# EAGLE board Slave_Micro_Circuit_Manual (EAGLE 9.3.0)
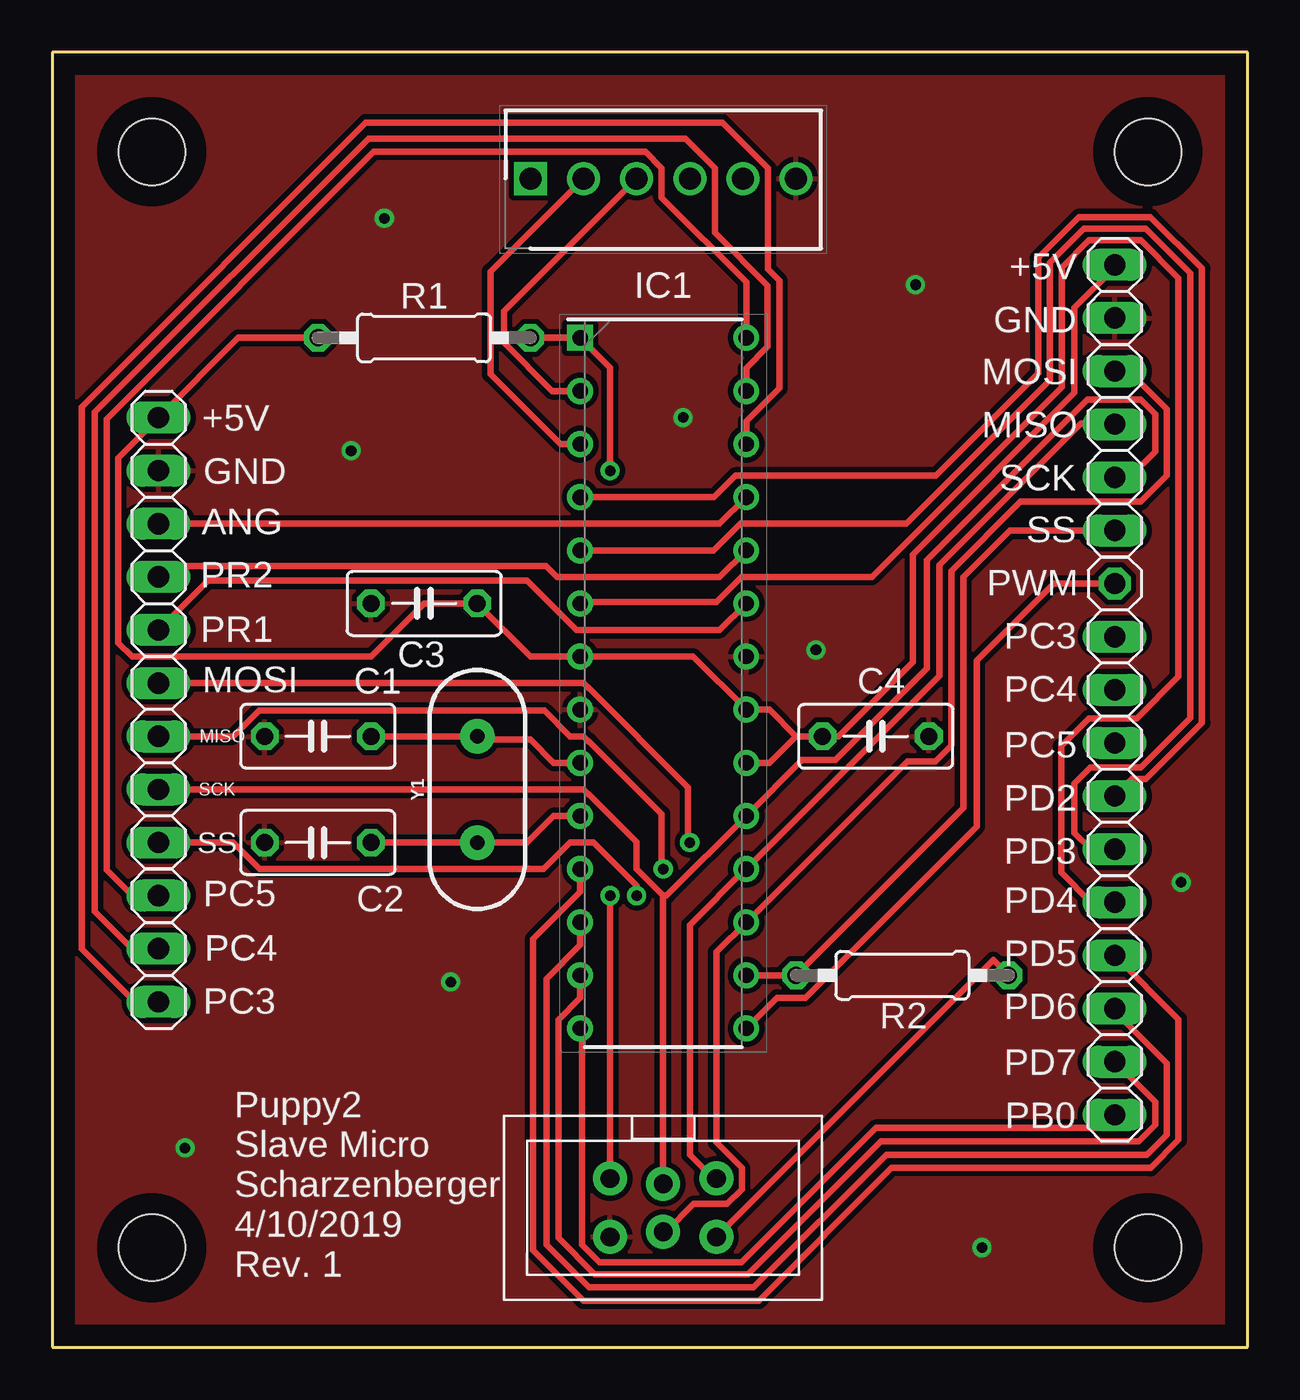
[diagram p0: board, top side]
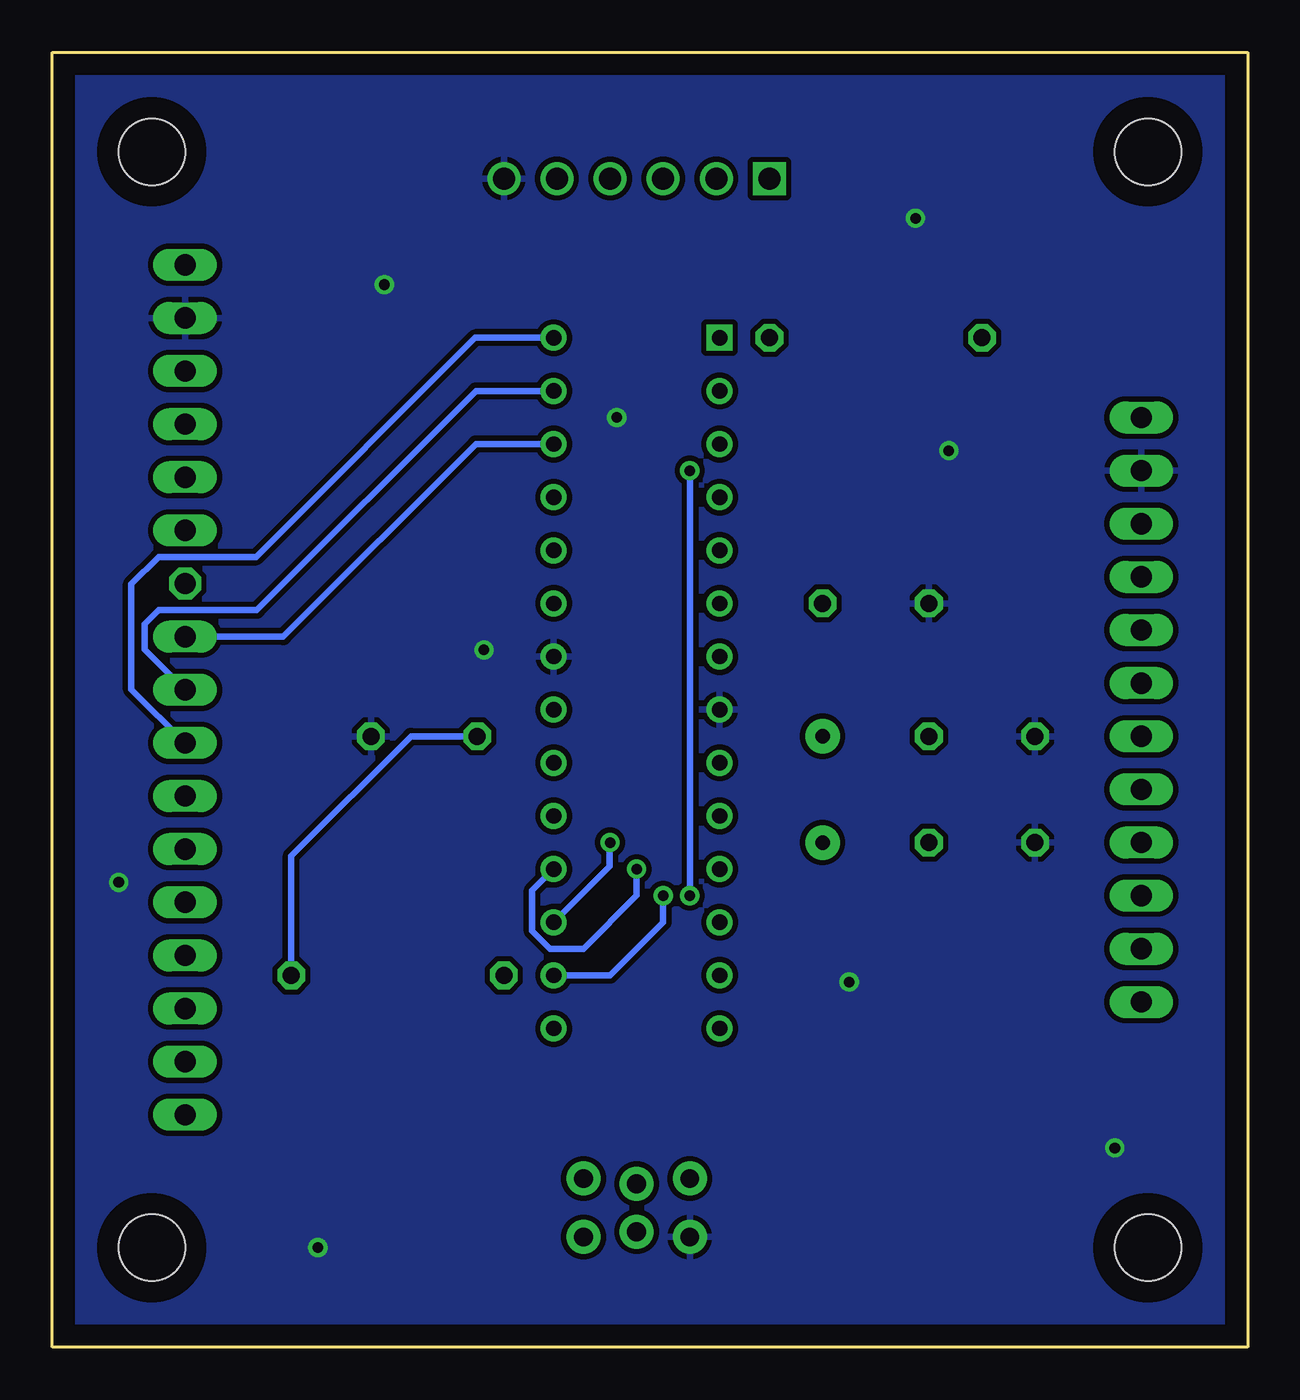
[diagram p1: board, bottom side, seen from below]

Size 57.15 x 61.91 mm. Coordinates in mm from the lower left corner, seen from the top.
Outline: 0,0 57.15,0 57.15,61.91 0,61.91 0,0
Copper layers (1*16): Top 0.035mm / dielectric 1.5mm / Bottom 0.035mm
Design rules "default": minimum track width 6mil, minimum drill 0.35mm, track to track 6mil, track to pad 6mil, pad to pad 6mil, via to via 6mil, smd to smd 6mil, copper to edge 40mil, drill to drill 6mil, minimum pad ring 10mil, minimum via ring 8mil, stop-mask expansion 4mil, vias tented up to drill 0mil, thermal gap 10mil
Net classes: 0 default: width 0.305 mm, drill 0.508 mm, clearance 0.254 mm
Holes 3.17 mm at 4.76,57.15 52.39,57.15 52.39,4.76 4.76,4.76

## Footprints (pad centres in the part's own frame; a part is rotated, then mirrored left to right if it is on the bottom)
C050-030X075 = drill 0.813 octagon: 1 -2.54,0; 2 2.54,0
DIP794W53P254L3467H457Q28N = drill 0.733 pad 1.133 square: 1 -3.969,16.51 | drill 0.733 pad 1.133: 2 -3.969,13.97; 3 -3.969,11.43; 4 -3.969,8.89; 5 -3.969,6.35; 6 -3.969,3.81; 7 -3.969,1.27; 8 -3.969,-1.27; 9 -3.969,-3.81; 10 -3.969,-6.35; 11 -3.969,-8.89; 12 -3.969,-11.43; 13 -3.969,-13.97; 14 -3.969,-16.51; 15 3.969,-16.51; 16 3.969,-13.97; 17 3.969,-11.43; 18 3.969,-8.89; 19 3.969,-6.35; 20 3.969,-3.81; 21 3.969,-1.27; 22 3.969,1.27; 23 3.969,3.81; 24 3.969,6.35; 25 3.969,8.89; 26 3.969,11.43; 27 3.969,13.97; 28 3.969,16.51
AVRISP-BOX = drill 0.9 pad 1.626: 1 -1.397,2.54; 2 1.397,2.54; 3 -1.143,0; 4 1.143,0; 5 -1.397,-2.54; 6 1.397,-2.54
SHDR6W87P0X254_1X6_1509X635X10 = drill 1.05 pad 1.575 square: 1 0,0 | drill 1.05 pad 1.575: 2 2.54,0; 3 5.08,0; 4 7.62,0; 5 10.16,0; 6 12.7,0
1X02 = drill 1.016 long: 1 -1.27,0; 2 1.27,0
1X04 = drill 1.016 long: 1 -3.81,0; 2 -1.27,0; 3 1.27,0; 4 3.81,0
1X10 = drill 1.016 long: 1 -11.43,0; 2 -8.89,0; 3 -6.35,0; 4 -3.81,0; 5 -1.27,0; 6 1.27,0; 7 3.81,0; 8 6.35,0; 9 8.89,0; 10 11.43,0
1X03 = drill 1.016 long: 1 -2.54,0; 2 0,0; 3 2.54,0
1X01 = drill 1.016 octagon: 1 0,0
0207/10 = drill 0.813 octagon: 1 -5.08,0; 2 5.08,0
HC49US = drill 0.7 pad 1.651: 1 -2.54,0; 2 2.54,0

## Placement (x,y rotation side)
C1  [C050-030X075]  12.7,29.21 180 top
C2  [C050-030X075]  12.7,24.13 180 top
C3  [C050-030X075]  17.78,35.56 180 top
C4  [C050-030X075]  39.37,29.21 0 top
IC1  ATMEGA88A-PU  [DIP794W53P254L3467H457Q28N]  29.21,31.75 0 top
ISP1  AVRISP-BOX  [AVRISP-BOX]  29.21,6.67 270 top
J1  22-23-2061  [SHDR6W87P0X254_1X6_1509X635X10]  22.86,55.88 0 top
JP1  [1X02]  5.08,43.18 90 top
JP2  [1X02]  50.8,50.48 90 top
JP3  [1X04]  5.08,27.94 270 top
JP4  [1X04]  50.8,42.86 270 top
JP5  [1X10]  50.8,22.54 270 top
JP6  [1X03]  5.08,36.83 90 top
JP7  [1X01]  50.8,36.51 0 top
JP8  [1X03]  5.08,19.05 90 top
R1  [0207/10]  17.78,48.26 0 top
R2  [0207/10]  40.64,17.78 180 top
Y1  16MHz  [HC49US]  20.32,26.67 90 top

## Library data of the parts
C1-C4 ISP1 = adafruit
IC1 = SamacSys_Parts; DESCRIPTION: ATMEGA88A-PU, 8 bit AVR Microcontroller 20MHz 512 B, 8 kB Flash, 1 kB RAM, I2C 28-Pin PDIP; HEIGHT: 4.572mm; MANUFACTURER_NAME: Microchip; MANUFACTURER_PART_NUMBER: ATMEGA88A-PU; MOUSER_PART_NUMBER: 556-ATMEGA88A-PU
J1 = SamacSys_Parts; DESCRIPTION: 2.54mm,header,KK,vert,Sn,frictn lock,6w Molex KK 254 Series, Series Number 6373, 2.54mm Pitch 6 Way 1 Row Straight PCB Header, Through Hole, Solder Termination; HEIGHT: 10.67mm; MANUFACTURER_NAME: Molex; MANUFACTURER_PART_NUMBER: 22-23-2061; MOUSER_PART_NUMBER: 538-22-23-2061
JP1-JP8 = pinhead
R1 R2 = rcl; SPICEPREFIX: R
Y1 = SparkFun-Clocks; PROD_ID: XTAL-08181; SF_ID: COM-00536

## Nets
+5V: C3.1 C4.1 IC1.7 IC1.20 IC1.21 ISP1.2 JP1.2 JP2.2 R1.1 R2.1
GND: C1.2 C2.2 C3.2 C4.2 IC1.8 IC1.22 ISP1.6 J1.6 JP1.1 JP2.1
MISO: IC1.18 ISP1.1 JP3.2 JP4.2
MOSI: IC1.17 ISP1.4 JP3.1 JP4.1
N$543: C2.1 IC1.10 Y1.1
N$546: C1.1 IC1.9 Y1.2
PB0: IC1.14 JP5.10
PC3: IC1.26 JP5.1 JP8.1
PC4: IC1.27 JP5.2 JP8.2
PC5: IC1.28 JP5.3 JP8.3
PD2: IC1.4 JP5.4
PD3: IC1.5 JP5.5
PD4: IC1.6 JP5.6
PD5: IC1.11 JP5.7
PD6: IC1.12 JP5.8
PD7: IC1.13 JP5.9
PRESSURE1: IC1.23 JP6.1
PRESSURE2: IC1.24 JP6.2
PWM: IC1.15 JP7.1
RESET: IC1.1 ISP1.5 R1.2
RX: IC1.2 J1.3
SCK: IC1.19 ISP1.3 JP3.3 JP4.3
SS: IC1.16 JP3.4 JP4.4 R2.2
THETA: IC1.25 JP6.3
TX: IC1.3 J1.2

## Tracks (layer width: path | path; a pad name or v marks a point on that pad's centre or on a via)
+5V
  Top 0.305: R1.1 8.89,48.26 JP1.2 3.15,42.52 3.15,33.68 3.81,33.02 15.24,33.02 17.78,35.56 C3.1 22.86,33.02 IC1.7 30.64,33.02 IC1.21 34.29,30.48 35.56,29.21 | R2.1 44.99,18.51 ISP1.2 | 35.56,29.21 C4.1 37.59,29.21 41.15,32.77 41.15,37.91 48.87,45.63 48.87,49.7 50.8,51.63 JP2.2 | 35.56,29.21 34.29,27.94 IC1.20
  Bottom 0.305: R2.1 45.72,23.5 40.01,29.21 C4.1
GND  (via drill 0.51)
  other vias: 6.35,9.53 19.05,17.46 14.29,42.86 15.88,53.98 41.27,50.8 36.51,33.34 53.98,22.23 44.45,4.76 30.16,44.45
  pour Top: -1.27,63.5 -1.27,-1.27 58.8,-1.27 58.8,63.5
  pour Bottom: -1.27,63.5 -1.27,-1.27 58.8,-1.27 58.8,63.5
MISO  (via drill 0.51)
  Top 0.305: ISP1.1 31.62,8.06 30.48,9.21 30.48,20.19 33.15,22.86 IC1.18 42.42,32.1 42.42,37.4 49.18,44.16 50.77,44.16 JP4.2 | JP3.2 8.65,29.21 9.88,30.44 23.53,30.44 24.76,29.21 25.4,29.21 25.64,28.97 25.67,28.97 29.13,25.5 29.13,22.94 v29.21,22.86
  Bottom 0.305: IC1.18 34.21,21.83 34.21,19.89 33.36,19.05 31.75,19.05 29.21,21.59 v29.21,22.86
MOSI  (via drill 0.51)
  Top 0.305: ISP1.4 29.34,5.52 30.66,6.84 32.26,6.84 32.97,7.56 32.97,8.57 31.75,9.79 31.75,18.89 IC1.17 40.88,28.02 42.23,28.02 42.98,28.77 42.98,37.1 46.3,40.42 52.05,40.42 53.29,41.67 53.29,44.85 51.47,46.67 JP4.1 | JP3.1 25.4,31.75 25.64,31.51 25.67,31.51 30.4,26.77 30.4,24.21 v30.48,24.13
  Bottom 0.305: IC1.17 30.5,23 30.5,24.11 v30.48,24.13
N$543
  Top 0.305: IC1.10 23.97,25.4 22.7,24.13 Y1.1 C2.1
N$546
  Top 0.305: IC1.9 23.97,27.94 22.86,29.05 20.48,29.05 Y1.2 C1.1
PB0
  Top 0.305: JP5.10 50.16,10.48 39.37,10.48 32.94,4.05 26.16,4.05 25.32,4.89 25.32,15.16 IC1.14
PC3
  Top 0.305: IC1.26 33.18,44.27 34.77,45.85 34.77,50.99 34.21,51.54 34.21,56.38 32.04,58.55 14.99,58.55 1.4,44.96 1.4,19.05 3.94,16.51 JP8.1
  Bottom 0.305: IC1.26 36.89,43.18 46.1,33.97 JP5.1
PC4
  Top 0.305: IC1.27 33.18,46.81 34.21,47.84 34.21,50.76 31.67,53.29 31.67,56.38 30.26,57.78 15.11,57.78 2.03,44.7 2.03,20.83 3.81,19.05 JP8.2
  Bottom 0.305: JP5.2 52.73,33.36 52.73,34.58 52.07,35.24 47.37,35.24 36.89,45.72 IC1.27
PC5
  Top 0.305: IC1.28 33.18,50.93 29.13,54.97 29.13,56.38 28.36,57.15 15.37,57.15 2.59,44.38 2.59,22.81 3.81,21.59 JP8.3
  Bottom 0.305: JP5.3 53.37,31.46 53.37,36.49 52.07,37.78 47.4,37.78 36.92,48.26 IC1.28
PD2
  Top 0.305: JP5.4 51.61,27.16 52.28,27.16 54.97,29.85 54.97,51.58 52.51,54.04 49.09,54.04 47.14,52.09 47.14,46.57 42.24,41.67 32.65,41.67 31.63,40.64 IC1.4
PD3
  Top 0.305: JP5.5 49.66,23.81 48.87,24.6 48.87,26.96 49.63,27.72 52.05,27.72 54.41,30.09 54.41,51.35 52.28,53.48 49.32,53.48 47.7,51.86 47.7,46.24 40.83,39.37 32.89,39.37 31.62,38.1 IC1.5
PD4
  Top 0.305: JP5.6 49.66,21.27 48.23,22.69 48.23,28.74 49.55,30.06 51.84,30.06 53.85,32.07 53.85,51.12 52.05,52.92 49.55,52.92 48.26,51.63 48.26,45.91 39.18,36.83 32.95,36.83 31.76,35.64 25.32,35.64 IC1.6
PD5
  Top 0.305: JP5.7 53.85,15.68 53.85,9.91 52.51,8.57 40.13,8.57 33.78,2.22 25.4,2.22 22.99,4.64 22.99,19.52 25.24,21.77 IC1.11
PD6
  Top 0.305: JP5.8 50.8,16.07 53.29,13.58 53.29,10.16 52.34,9.21 39.88,9.21 33.53,2.86 25.65,2.86 23.62,4.89 23.62,17.61 25.24,19.23 IC1.12
PD7
  Top 0.305: JP5.9 52.73,11.72 52.73,10.63 51.94,9.84 39.62,9.84 33.27,3.49 25.93,3.49 24.21,5.22 24.21,15.66 25.24,16.69 IC1.13
PRESSURE1
  Top 0.305: JP6.1 7.45,36.66 22.69,36.66 25.06,34.29 31.91,34.29 IC1.23
PRESSURE2
  Top 0.305: JP6.2 5.6,37.35 23.61,37.35 24.13,36.83 31.91,36.83 IC1.24
PWM
  Top 0.305: IC1.15 34.65,16.71 36,16.71 44.2,24.91 44.2,32.83 47.88,36.51 JP7.1
RESET  (via drill 0.51)
  Top 0.305: R1.2 IC1.1 26.67,46.83 v26.67,41.91 | v26.67,21.59 ISP1.5
  Bottom 0.305: v26.67,41.91 v26.67,21.59
RX
  Top 0.305: IC1.2 23.89,45.72 21.59,48.02 21.59,49.53 J1.3
SCK
  Top 0.305: ISP1.3 29.21,21.59 | JP3.3 25.4,26.67 25.64,26.43 25.67,26.43 27.94,24.15 27.94,22.86 29.21,21.59 | JP4.3 51.5,41.59 52.73,42.82 52.73,44.62 52.05,45.3 49.49,45.3 41.82,37.63 41.82,32.45 37.43,28.07 35.85,28.07 IC1.19 29.37,21.59 29.21,21.59
SS  (via drill 0.51)
  Top 0.305: IC1.16 R2.2 43.56,25.78 43.56,36.83 45.78,39.05 JP4.4 | JP3.4 8.65,24.13 9.92,22.86 23.49,22.86 24.76,24.13 25.88,24.13 27.94,22.07 v27.94,21.59
  Bottom 0.305: v27.94,21.59 27.94,20.32 30.48,17.78 IC1.16
THETA
  Top 0.305: IC1.25 31.91,39.37 JP6.3
TX
  Top 0.305: IC1.3 24.29,43.18 20.95,46.51 20.95,51.44 J1.2

## Text on the board
tPlace: +5V | GND | MOSI | +5V | MISO | GND | SCK | ANG | SS | PR2 | PWM | PR1 | PC3 | MOSI | PC4 | MISO | PC5 | SCK | PD2 | SS | PD3 | PC5 | PD4 | PC4 | PD5 | PC3 | PD6 | PD7 | PB0 | Puppy2 / Slave Micro / Scharzenberger / 4/10/2019 / Rev. 1